# EAGLE board ECU_MULT_CAR (EAGLE 7.4.0), part 1 of 3
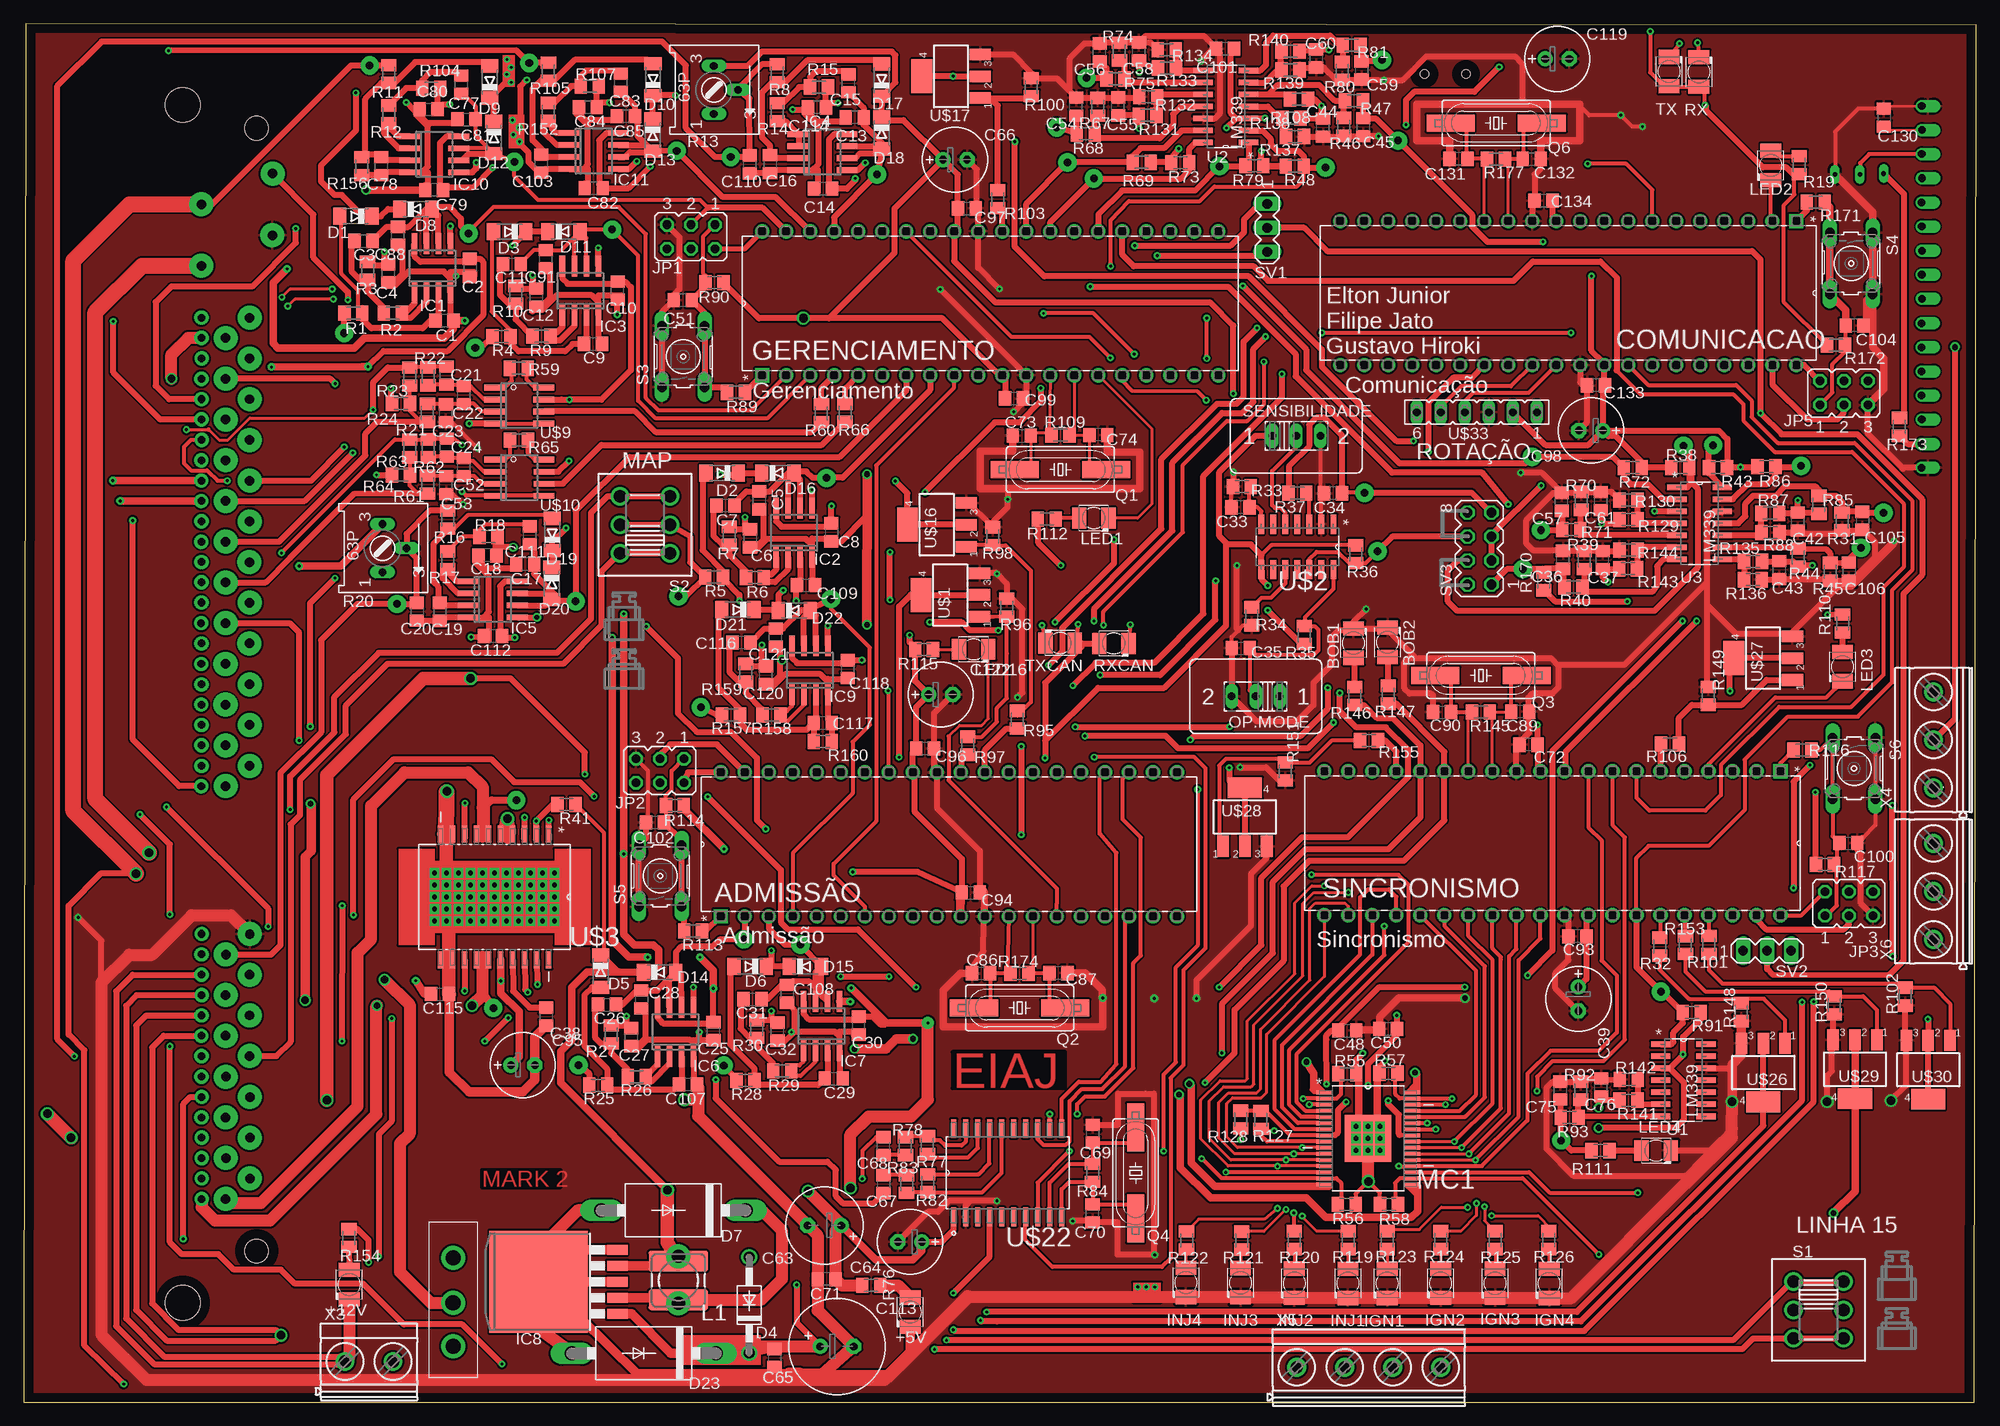
[diagram p0: board, top side]
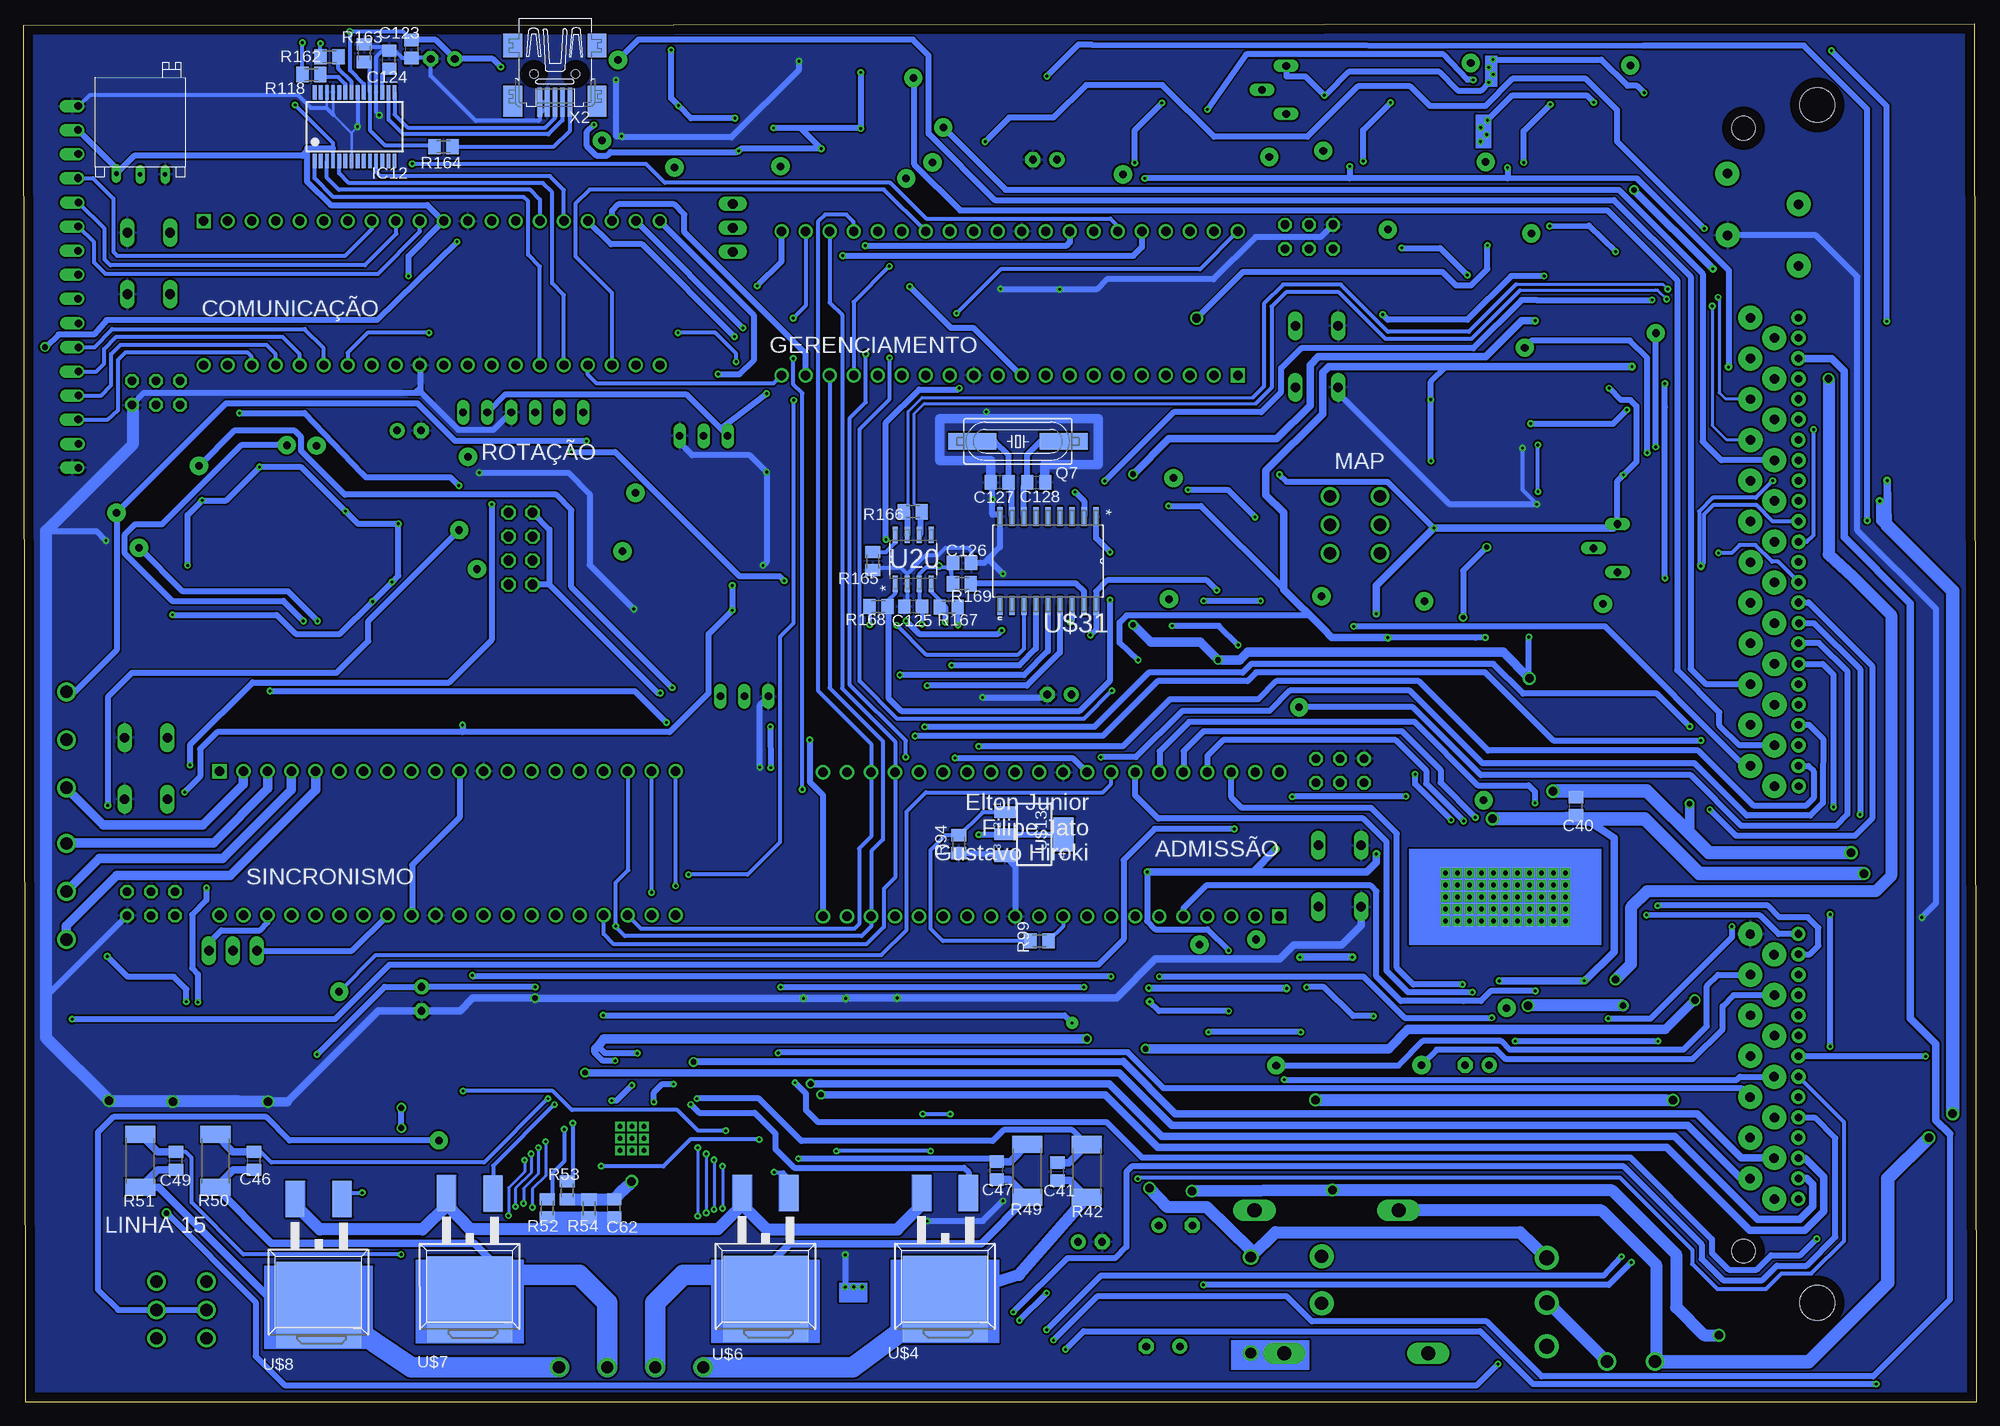
[diagram p1: board, bottom side, seen from below]

Size 206.56 x 145.88 mm. Coordinates in mm from the lower left corner, seen from the top.
Outline: 0,0 0.21,145.88 206.56,145.7 206.32,0.63
Outline: 0,0 206.33,0 206.33,0.64
Copper layers (1*16): Top 0.035mm / dielectric 1.5mm / Bottom 0.035mm
Design rules "default *": minimum track width 24mil, minimum drill 24mil, track to track 8mil, track to pad 8mil, pad to pad 8mil, via to via 8mil, smd to smd 8mil, copper to edge 40mil, drill to drill 8mil, minimum pad ring 10mil, minimum via ring 8mil, stop-mask expansion 4mil, vias tented up to drill 0mil, thermal gap 10mil
Net classes: 0 default: clearance 0.205 mm
bKeepout: area -69.6,118 to -69.6,118.1; area -69.6,118 to -69.6,118.1; area -69.6,118 to -69.6,118; area -69.6,118 to -69.6,118; area -69.6,118 to -69.6,118; area -69.6,118 to -69.6,118; area -69.6,118 to -69.6,118; area -69.6,118 to -69.6,118; area -69.6,118 to -69.6,118; area -69.6,118 to -69.6,118; area -69.6,118 to -69.6,118; area -69.6,118 to -69.6,118; 741 more areas

## Footprints (pad centres in the part's own frame; a part is rotated, then mirrored left to right if it is on the bottom)
KA-3528ASYC = smd 1.5 x 2.2: A -1.55,0; C 1.55,0
DIP40 = drill 0.991 square: 1 -7.62,24.13 | drill 0.991: 2 -7.62,21.59; 3 -7.62,19.05; 4 -7.62,16.51; 5 -7.62,13.97; 6 -7.62,11.43; 7 -7.62,8.89; 8 -7.62,6.35; 9 -7.62,3.81; 10 -7.62,1.27; 11 -7.62,-1.27; 12 -7.62,-3.81; 13 -7.62,-6.35; 14 -7.62,-8.89; 15 -7.62,-11.43; 16 -7.62,-13.97; 17 -7.62,-16.51; 18 -7.62,-19.05; 19 -7.62,-21.59; 20 -7.62,-24.13; 21 7.62,-24.13; 22 7.62,-21.59; 23 7.62,-19.05; 24 7.62,-16.51; 25 7.62,-13.97; 26 7.62,-11.43; 27 7.62,-8.89; 28 7.62,-6.35; 29 7.62,-3.81; 30 7.62,-1.27; 31 7.62,1.27; 32 7.62,3.81; 33 7.62,6.35; 34 7.62,8.89; 35 7.62,11.43; 36 7.62,13.97; 37 7.62,16.51; 38 7.62,19.05; 39 7.62,21.59; 40 7.62,24.13
PINO_TORNEADO = drill 0.8 pad 1.93: 1 0,0
C0805 = smd 1.3 x 1.5: 1 -0.95,0; 2 0.95,0
E2,5-7 = drill 0.813 pad 1.6: + -1.27,0 | drill 0.813 pad 1.6 octagon: - 1.27,0
E3,5-8 = drill 0.813 pad 1.6: + -1.778,0 | drill 0.813 pad 1.6 octagon: - 1.778,0
E3,5-10 = drill 0.813 pad 1.6: + -1.778,0 | drill 0.813 pad 1.6 octagon: - 1.778,0
MINIMELF = smd 1.4 x 1.8: A 1.7,0; C -1.7,0
DO41-10 = drill 1.118: A 5.08,0; C -5.08,0
DO201-15 = drill 1.499 long: A 7.62,0; C -7.62,0
SO08 = smd 0.6 x 2.2: 1 -1.905,-2.6; 2 -0.635,-2.6; 3 0.635,-2.6; 4 1.905,-2.6; 5 1.905,2.6; 6 0.635,2.6; 7 -0.635,2.6; 8 -1.905,2.6
TO263-5 = smd 1.067 x 2.159: 1 -3.404,-5.791; 2 -1.702,-5.791; 3 0,-5.791; 4 1.702,-5.791; 5 3.404,-5.791 | smd 10.8 x 10.41: 6 0,2.54
SSOP28 = smd 0.4 x 1.5: 1 -4.225,-3.625; 2 -3.575,-3.625; 3 -2.925,-3.625; 4 -2.275,-3.625; 5 -1.625,-3.625; 6 -0.975,-3.625; 7 -0.325,-3.625; 8 0.325,-3.625; 9 0.975,-3.625; 10 1.625,-3.625; 11 2.275,-3.625; 12 2.925,-3.625; 13 3.575,-3.625; 14 4.225,-3.625; 15 4.225,3.625; 16 3.575,3.625; 17 2.925,3.625; 18 2.275,3.625; 19 1.625,3.625; 20 0.975,3.625; 21 0.325,3.625; 22 -0.325,3.625; 23 -0.975,3.625; 24 -1.625,3.625; 25 -2.275,3.625; 26 -2.925,3.625; 27 -3.575,3.625; 28 -4.225,3.625
JP3Q = drill 0.914 octagon: 1 -2.54,-1.27; 2 -2.54,1.27; 3 0,-1.27; 4 0,1.27; 5 2.54,-1.27; 6 2.54,1.27
POWER-CHOKE_WE-TPC = smd 6.3 x 2.2: 1 0,2.05; 2 0,-2.05
SOIC_32_PIN = smd 1.6 x 0.432: 1 -4.699,4.877; 2 -4.699,4.216; 3 -4.699,3.581; 4 -4.699,2.921; 5 -4.699,2.286; 6 -4.699,1.626; 7 -4.699,0.965; 8 -4.699,0.33; 9 -4.699,-0.33; 10 -4.699,-0.965; 11 -4.699,-1.626; 12 -4.699,-2.286; 13 -4.699,-2.921; 14 -4.699,-3.581; 15 -4.699,-4.216; 16 -4.699,-4.877; 17 4.699,-4.877; 18 4.699,-4.216; 19 4.699,-3.581; 20 4.699,-2.921; 21 4.699,-2.286; 22 4.699,-1.626; 23 4.699,-0.965; 24 4.699,-0.33; 25 4.699,0.33; 26 4.699,0.965; 27 4.699,1.626; 28 4.699,2.286; 29 4.699,2.921; 30 4.699,3.581; 31 4.699,4.216; 32 4.699,4.877 | smd 4.953 x 4.953: 33 0,0 | drill 0.5 square: P$1 0,0; P$2 1.27,0; P$3 -1.27,0; P$4 -1.27,1.27; P$5 0,1.27; P$6 1.27,1.27; P$7 1.27,-1.27; P$8 0,-1.27; P$9 -1.27,-1.27
M251 = drill 0.813 long: 1 -2.54,0; 2 0,0; 3 2.54,0
V23542-A1280-B300 = drill 1 pad 2.54: 1 72.378,-4.91; 2 65.861,-4.9; 27 69.126,2.618; 28 62.618,2.61; 29 57.128,-2.488; 30 52.809,-2.488; 31 48.516,-2.488; 32 44.198,-2.471; 33 39.888,-2.479; 34 35.57,-2.479; 35 31.27,-2.467; 36 26.977,-2.477; 37 22.663,-2.467; 38 18.329,-2.477; 39 14.035,-2.484; 40 9.711,-2.484; 41 54.973,0.056; 42 50.663,0.056; 43 46.353,0.056; 44 42.052,0.065; 45 37.742,0.065; 46 33.432,0.059; 47 29.118,0.059; 48 24.815,0.059; 49 20.491,0.069; 50 16.177,0.069; 51 11.866,0.053; 52 7.563,0.053; 67 -8.09,-2.497; 68 -12.391,-2.488; 69 -16.701,-2.488; 70 -21.002,-2.488; 71 -25.338,-2.505; 72 -29.648,-2.505; 73 -33.957,-2.505; 74 -10.253,0.039; 75 -14.554,0.056; 76 -18.847,0.056; 77 -23.191,0.039; 78 -27.501,0.048; 79 -31.794,0.039; 80 -36.121,0.048 | drill 0.8 pad 1.5: 3 57.132,2.617; 4 52.818,2.596; 5 48.515,2.607; 6 44.201,2.596; 7 39.887,2.627; 8 35.583,2.607; 9 31.279,2.617; 10 26.986,2.617; 11 22.662,2.617; 12 18.33,2.612; 13 14.038,2.612; 14 9.71,2.6; 15 54.991,2.607; 16 50.656,2.617; 17 46.373,2.617; 18 42.039,2.627; 19 37.735,2.627; 20 33.421,2.627; 21 29.138,2.617; 22 24.814,2.637; 23 20.494,2.637; 24 16.19,2.624; 25 11.886,2.612; 26 7.558,2.637; 53 -8.079,2.586; 54 -12.392,2.607; 55 -16.702,2.6; 56 -21.006,2.6; 57 -25.324,2.596; 58 -29.628,2.596; 59 -33.952,2.596; 60 -10.23,2.607; 61 -14.55,2.587; 62 -18.854,2.624; 63 -23.182,2.612; 64 -27.496,2.617; 65 -31.8,2.586; 66 -36.114,2.596 | hole 2.5: 77.179,-3.212; -41.621,-3.229 | hole 3.7: 79.642,4.596; -47.122,4.596
SM49 = smd 5.08 x 1.778: 1 -4.826,0; 2 4.826,0
M0805 = smd 1.3 x 1.6: 1 -0.95,0; 2 0.95,0
S63P = drill 0.813 long: A 2.54,0; E -2.54,0; S 0,2.54
R2512 = smd 1.8 x 3.2: 1 -2.8,0; 2 2.8,0
2P2T = drill 1.3 pad 1.93: 1.1 -3,2.65; 1.2 -3,-2.65; 2.1 0,2.65; 2.2 0,-2.65; 3.1 3,2.65; 3.2 3,-2.65
B3F-10XX = drill 1.016 long: 1 -3.251,2.261; 2 3.251,2.261; 3 -3.251,-2.261; 4 3.251,-2.261
MA03-1 = drill 1.016 long: 1 -2.54,0; 2 0,0; 3 2.54,0
MA04-2 = drill 1.016 octagon: 1 -3.81,-1.27; 2 -3.81,1.27; 3 -1.27,-1.27; 4 -1.27,1.27; 5 1.27,-1.27; 6 1.27,1.27; 7 3.81,-1.27; 8 3.81,1.27
SOIC14N = smd 2.057 x 0.61: 1 -2.261,3.81; 2 -2.261,2.54; 3 -2.261,1.27; 4 -2.261,0; 5 -2.261,-1.27; 6 -2.261,-2.54; 7 -2.261,-3.81; 8 2.54,-3.81; 9 2.54,-2.54; 10 2.54,-1.27; 11 2.54,0; 12 2.54,1.27; 13 2.54,2.54; 14 2.54,3.81
SOIC127P600X175-8N = smd 1.702 x 0.533: 1 -2.591,1.905; 2 -2.591,0.635; 3 -2.591,-0.635; 4 -2.591,-1.905; 5 2.591,-1.905; 6 2.591,-0.635; 7 2.591,0.635; 8 2.591,1.905
SOT-223 = smd 1.219 x 2.235: 1 -2.311,-3.099; 2 0,-3.099; 3 2.311,-3.099 | smd 3.6 x 2.2: 4 0,3.099
SOICLM1815 = smd 2.057 x 0.61: 1 -2.261,3.81; 2 -2.261,2.54; 3 -2.261,1.27; 4 -2.261,0; 5 -2.261,-1.27; 6 -2.261,-2.54; 7 -2.261,-3.81; 8 2.54,-3.81; 9 2.54,-2.54; 10 2.54,-1.27; 11 2.54,0; 12 2.54,1.27; 13 2.54,2.54; 14 2.54,3.81
HSOP-20-PIN = smd 1.803 x 0.559: 1 -6.68,5.715; 2 -6.68,4.445; 3 -6.68,3.175; 4 -6.68,1.905; 5 -6.68,0.635; 6 -6.68,-0.635; 7 -6.68,-1.905; 8 -6.68,-3.175; 9 -6.68,-4.445; 10 -6.68,-5.715; 11 6.68,-5.715; 12 6.68,-4.445; 13 6.68,-3.175; 14 6.68,-1.905; 15 6.68,-0.635; 16 6.68,0.635; 17 6.68,1.905; 18 6.68,3.175; 19 6.68,4.445; 20 6.68,5.715 | smd 1 x 0.35: 21A -0.002,0.351 | drill 0.5 square: P$2 0,0; P$3 1.27,0; P$4 2.54,0; P$5 2.54,1.27; P$6 1.27,1.27; P$7 0,1.27; P$8 -1.27,1.27; P$9 -2.54,1.27; P$10 -2.54,0; P$11 -1.27,0; P$12 -1.27,2.54; P$13 -2.54,2.54; P$14 -2.54,3.81; P$15 -1.27,3.81; P$16 0,2.54; P$17 0,3.81; P$18 1.27,3.81; P$19 1.27,2.54; P$20 2.54,2.54; P$21 2.54,3.81; P$22 -2.54,5.08; P$23 -1.27,5.08; P$24 0,5.08; P$25 1.27,5.08; P$26 2.54,5.08; P$27 2.54,6.35; P$28 1.27,6.35; P$29 0,6.35; P$30 -1.27,6.35; P$31 -2.54,6.35; P$32 -2.54,-1.27; P$33 -1.27,-1.27; P$34 0,-1.27; P$35 1.27,-1.27; P$36 2.54,-1.27; P$37 2.54,-2.54; P$38 1.27,-2.54; P$39 0,-2.54; P$40 -1.27,-2.54; P$41 -2.54,-2.54; P$42 -2.54,-3.81; P$43 -1.27,-3.81; P$44 0,-3.81; P$45 1.27,-3.81; P$46 2.54,-3.81; P$47 2.54,-5.08; P$48 1.27,-5.08; P$49 0,-5.08; P$50 -1.27,-5.08; P$51 -2.54,-5.08; P$52 -2.54,-6.35; P$53 -1.27,-6.35; P$54 0,-6.35; P$55 1.27,-6.35; P$56 2.54,-6.35
TO-263AB = smd 1.93 x 3.81: DRAIN 2.458,-8.649; GATE -2.49,-8.649 | smd 8.992 x 9.093: SOURCE -0.032,2.572
SOIC-8 = smd 0.6 x 2.2: 1 -1.905,-2.6; 2 -0.635,-2.6; 3 0.635,-2.6; 4 1.905,-2.6; 5 1.905,2.6; 6 0.635,2.6; 7 -0.635,2.6; 8 -1.905,2.6
MAGIRUS_TICTAC_3_PIN = drill 1.6 pad 2.54: 1 5.08,0; 2 0.288,0.029; 3 -4.29,0
JHD162A = drill 0.8 offset: P$1 -30.916,16.342; P$2 -28.361,16.347; P$3 -25.826,16.342; P$4 -23.281,16.358; P$5 -20.69,16.328; P$6 -18.161,16.342; P$7 -15.606,16.347; P$8 -13.07,16.342; P$9 -10.525,16.358; P$10 -7.935,16.328; P$11 -5.385,16.327; P$12 -2.83,16.332; P$13 -0.294,16.327; P$14 2.25,16.343; P$15 4.841,16.313; P$16 7.371,16.327
SOIC-20P = smd 1.981 x 0.559: 1 -4.674,5.715; 2 -4.674,4.445; 3 -4.674,3.175; 4 -4.674,1.905; 5 -4.674,0.635; 6 -4.674,-0.635; 7 -4.674,-1.905; 8 -4.674,-3.175; 9 -4.674,-4.445; 10 -4.674,-5.715; 11 4.674,-5.715; 12 4.674,-4.445; 13 4.674,-3.175; 14 4.674,-1.905; 15 4.674,-0.635; 16 4.674,0.635; 17 4.674,1.905; 18 4.674,3.175; 19 4.674,4.445; 20 4.674,5.715
SOIC127P1034X264-18N = smd 1.981 x 0.559: 1 -4.699,5.08; 2 -4.699,3.81; 3 -4.699,2.54; 4 -4.699,1.27; 5 -4.699,0; 6 -4.699,-1.27; 7 -4.699,-2.54; 8 -4.699,-3.81; 9 -4.699,-5.08; 10 4.699,-5.08; 11 4.699,-3.81; 12 4.699,-2.54; 13 4.699,-1.27; 14 4.699,0; 15 4.699,1.27; 16 4.699,2.54; 17 4.699,3.81; 18 4.699,5.08
TRIMPOT = drill 0.5 long: 1 10.259,7.373; 2 10.256,4.732; 3 10.182,2.231
FE06 = drill 0.813 long: 1 -6.35,0; 2 -3.81,0; 3 -1.27,0; 4 1.27,0; 5 3.81,0; 6 6.35,0
32005-201 = smd 3.1 x 0.5: 1 3,1.6; 2 3,0.8; 3 3,0; 4 3,-0.8; 5 3,-1.6 | smd 2.5 x 2: M1 -3,-4.45; M2 -3,4.45 | smd 3.3 x 2: M3 2.9,4.45; M4 2.9,-4.45 | hole 0.9: 0,2.2; 0,-2.2
MKDSN1,5/2-5,08 = drill 1.3 pad 2: 1 -2.561,0.025; 2 2.519,0.025
MKDSN1,5/3-5,08 = drill 1.3 pad 2: 1 -7.641,0.025; 2 -2.561,0.025; 3 2.519,0.025
MKDSN1,5/4-5,08 = drill 1.3 pad 2: 1 -7.641,0.025; 2 -2.561,0.025; 3 2.519,0.025; 4 7.599,0.025

## Placement (x,y rotation side)
+5V  [KA-3528ASYC]  93.78,9.53 270 top
+12V  [KA-3528ASYC]  34.44,12.45 270 top
ADMISSÃO  PIC18F44K22  [DIP40]  97.87,59.04 90 top
ANTER_IN  PINO_TORNEADO  [PINO_TORNEADO]  71.63,73.55 90 top
BOB1  [KA-3528ASYC]  140.67,80.33 90 top
BOB2  [KA-3528ASYC]  144.27,80.41 90 top
BORBOLETA_1  PINO_TORNEADO  [PINO_TORNEADO]  52.12,63.7 270 top
BORBOLETA_2  PINO_TORNEADO  [PINO_TORNEADO]  49.68,41.72 270 top
C1  100nF  [C0805]  44.52,114.46 0 top
C2  100nF  [C0805]  47.2,120.04 270 top
C3  100nF  [C0805]  35.95,122.88 0 top
C4  100nF  [C0805]  38.58,119.45 90 top
C5  100nF  [C0805]  77.81,95.43 270 top
C6  100nF  [C0805]  76.83,91.42 270 top
C7  100nF  [C0805]  74.24,94.87 180 top
C8  100nF  [C0805]  85.44,92.04 270 top
C9  100nF  [C0805]  60.22,111.99 0 top
C10  100nF  [C0805]  62.84,117.62 90 top
C11  100nF  [C0805]  51.65,120.42 0 top
C12  100nF  [C0805]  54.23,116.89 90 top
C13  100nF  [C0805]  87.92,135.95 180 top
C14  100nF  [C0805]  84.55,128.4 180 top
C15  100nF  [C0805]  87.26,139.56 90 top
C16  100nF  [C0805]  78.96,131.02 270 top
C17  100nF  [C0805]  53.06,88.66 180 top
C18  100nF  [C0805]  49.08,89.6 180 top
C19  100nF  [C0805]  44.02,83.64 270 top
C20  100nF  [C0805]  41.6,83.66 270 top
C21  1uF  [C0805]  44.73,108.64 90 top
C22  1uF  [C0805]  46.57,106.57 90 top
C23  1uF  [C0805]  44.68,104.66 90 top
C24  1uF  [C0805]  44.75,101.03 90 top
C25  100nF  [C0805]  72.97,39.27 90 top
C26  100nF  [C0805]  61.72,42.08 0 top
C27  100nF  [C0805]  64.28,38.64 90 top
C28  100nF  [C0805]  65.35,42.63 270 top
C29  100nF  [C0805]  85.69,34.26 0 top
C30  100nF  [C0805]  88.34,39.84 90 top
C31  100nF  [C0805]  77.11,42.65 0 top
C32  100nF  [C0805]  79.75,39.21 90 top
C33  330nF  [C0805]  128.71,94.71 180 top
C34  47nF  [C0805]  138.51,96.18 180 top
C35  1nF  [C0805]  128.74,79.79 0 top
C36  100nF  [C0805]  162.84,89.15 90 top
C37  100nF  [C0805]  167.03,89.11 90 top
C38  33nF  [C0805]  55.27,40.81 270 top
C39  100uF/16V  [E2,5-7]  164.47,42.68 270 top
C40  100nF  [C0805]  42.36,63.07 90 bottom
C41  100nF  [C0805]  97.21,24.4 90 bottom
C42  100nF  [C0805]  187.66,93.18 270 top
C43  100nF  [C0805]  185.71,88.06 270 top
C44  100nF  [C0805]  137.46,134.87 90 top
C45  100nF  [C0805]  141.72,134.92 90 top
C46  100nF  [C0805]  182.19,25.54 90 bottom
C47  100nF  [C0805]  103.64,24.51 90 bottom
C48  100nF  [C0805]  140.01,39.33 0 top
C49  100nF  [C0805]  190.44,25.54 90 bottom
C50  100nF  [C0805]  144.34,39.49 180 top
C51  100pF  [C0805]  69.71,116.61 180 top
C52  1uF  [C0805]  46.57,98.96 90 top
C53  1uF  [C0805]  44.7,97.05 90 top
C54  100nF  [C0805]  111.34,137.08 90 top
C55  100nF  [C0805]  115.79,137.11 90 top
C56  100nF  [C0805]  113.83,142.84 90 top
C57  100nF  [C0805]  162.7,95.29 90 top
C58  100nF  [C0805]  117.99,142.92 90 top
C59  100nF  [C0805]  141.53,140.94 270 top
C60  100nF  [C0805]  136.72,142.18 270 top
C61  100nF  [C0805]  166.84,95.36 90 top
C62  100nF  [C0805]  144.1,20.51 90 bottom
C63  470uf/25V  [E3,5-8]  84.71,18.7 180 top
C64  100uF/16V  [E2,5-7]  93.75,16.98 180 top
C65  100nF  [C0805]  79.44,4.69 270 top
C66  100uF/16V  [E2,5-7]  98.53,131.48 0 top
C67  100nF  [C0805]  90.97,23.08 270 top
C68  100nF  [C0805]  90.95,27.1 90 top
C69  22pF  [C0805]  113.09,28.41 270 top
C70  22pF  [C0805]  113.08,19.98 90 top
C71  100nF  [C0805]  84.95,13.02 180 top
C72  100pF  [C0805]  159.19,69.58 180 top
C73  22pF  [C0805]  105.59,102.28 0 top
C74  22pF  [C0805]  113.69,102.36 180 top
C75  100nF  [C0805]  162.56,32.99 90 top
C76  100nF  [C0805]  166.88,33.31 90 top
C77  100nF  [C0805]  46.28,139.42 270 top
C78  100nF  [C0805]  37.81,130.79 270 top
C79  100nF  [C0805]  43.42,128.26 180 top
C80  100nF  [C0805]  42.84,136.82 0 top
C81  100nF  [C0805]  46.84,135.76 0 top
C82  100nF  [C0805]  60.3,128.48 0 top
C83  100nF  [C0805]  63.16,139.63 270 top
C84  100nF  [C0805]  59.69,137.05 0 top
C85  100nF  [C0805]  63.73,136.08 180 top
C86  22pF  [C0805]  101.28,45.4 0 top
C87  22pF  [C0805]  109.46,45.41 180 top
C88  100nF  [C0805]  39.6,123.42 90 top
C89  22pF  [C0805]  158.32,73.07 180 top
C90  22pF  [C0805]  150.05,73.02 0 top
C91  100nF  [C0805]  55.24,120.96 90 top
C93  100pF  [C0805]  164.36,49.29 180 top
C94  100pF  [C0805]  100.2,53.93 0 top
C95  47uF/25V  [E2,5-7]  52.81,35.67 0 top
C96  100pF  [C0805]  95.36,69.18 0 top
C97  100pF  [C0805]  99.77,126.33 0 top
C98  100uF/16V  [E2,5-7]  165.79,102.83 180 top
C99  100pF  [C0805]  104.77,106.22 0 top
C100  100pF  [C0805]  193.02,59.17 0 top
C101  100nF  [C0805]  127.09,143.22 180 top
C102  100pF  [C0805]  66.79,61.34 180 top
C103  100nF  [C0805]  54.76,131.06 90 top
C104  100nF  [C0805]  193.69,113.93 180 top
C105  100nF  [C0805]  194.5,93.28 270 top
C106  100nF  [C0805]  193.07,87.9 270 top
C107  100nF  [C0805]  70.29,33.63 180 top
C108  100nF  [C0805]  80.74,43.22 270 top
C109  100nF  [C0805]  82.77,86.46 0 top
C110  100nF  [C0805]  76.81,130.99 270 top
C111  100nF  [C0805]  53.54,91.75 270 top
C112  100nF  [C0805]  49.66,81.07 180 top
C113  680uF/35V  [E3,5-10]  86.03,5.9 0 top
C114  100nF  [C0805]  83.93,137.01 180 top
C115  100nF  [C0805]  44.03,43.2 0 top
C116  100nF  [C0805]  75.94,80.39 0 top
C117  100nF  [C0805]  84.53,71.88 0 top
C118  100nF  [C0805]  87.16,77.58 270 top
C119  4u7F/16V  [E2,5-7]  162.23,142.15 0 top
C120  100nF  [C0805]  78.52,76.92 90 top
C121  100nF  [C0805]  79.55,80.91 90 top
C122  100uF/16V  [E2,5-7]  97,74.89 0 top
C123  100nF  [C0805]  165.54,143.21 270 bottom
C124  100nF  [C0805]  167.9,142.06 90 bottom
C125  100nF  [C0805]  112.47,84.18 180 bottom
C126  100nF  [C0805]  107.3,88.82 0 bottom
C127  10pF  [C0805]  103.32,97.34 180 bottom
C128  10pF  [C0805]  99.45,97.34 0 bottom
C130  100nF  [C0805]  196.78,135.93 270 top
C131  22pF  [C0805]  151.79,131.57 180 top
C132  22pF  [C0805]  159.52,131.56 0 top
C133  100pF  [C0805]  166.33,107.59 180 top
C134  100pF  [C0805]  160.79,127.13 180 top
COMUNICACAO  PIC18F44K22  [DIP40]  163.39,117.37 270 top
COND_ANA2_IN  PINO_TORNEADO  [PINO_TORNEADO]  53.48,141.71 90 top
COND_ANA_1_IN  PINO_TORNEADO  [PINO_TORNEADO]  36.6,141.46 0 top
D1  1n4148  [MINIMELF]  35.15,125.5 180 top
D2  1n4148  [MINIMELF]  73.89,98.3 180 top
D3  1n4148  [MINIMELF]  51.4,123.86 180 top
D4  1N4004  [DO41-10]  76.76,10.29 90 top
D5  1n4148  [MINIMELF]  61.05,45.6 270 top
D6  1n4148  [MINIMELF]  76.84,46.11 180 top
D7  1N5624  [DO201-15]  68.74,20.3 180 top
D8  1n4148  [MINIMELF]  41.5,126.26 0 top
D9  1n4148  [MINIMELF]  49.31,139.71 90 top
D10  1n4148  [MINIMELF]  66.58,139.94 90 top
D11  1n4148  [MINIMELF]  57.15,123.87 0 top
D12  1n4148  [MINIMELF]  49.75,133.83 270 top
D13  1n4148  [MINIMELF]  66.55,134.09 270 top
D14  1n4148  [MINIMELF]  67.27,45.5 0 top
D15  1n4148  [MINIMELF]  82.69,46.11 0 top
D16  1n4148  [MINIMELF]  79.78,98.33 0 top
D17  1n4148  [MINIMELF]  90.76,139.9 90 top
D18  1n4148  [MINIMELF]  90.76,134.31 270 top
D19  1n4148  [MINIMELF]  55.91,91.82 90 top
D20  1n4148  [MINIMELF]  55.88,86.64 270 top
D21  1n4148  [MINIMELF]  75.55,83.88 180 top
D22  1n4148  [MINIMELF]  81.52,83.79 0 top
D23  1N5624  [DO201-15]  65.6,5.18 180 top
DRILEGEND  [DRILEGEND]  0.28,0.42 0 top
GERENCIAMENTO  PIC18F44K22  [DIP40]  102.25,116.28 90 top
IC1  LM358D  [SO08]  43.25,120 0 top
IC2  LM358D  [SO08]  81.51,92.01 0 top
IC3  LM358D  [SO08]  58.89,117.62 0 top
IC4  LM358D  [SO08]  84.49,132.28 270 top
IC5  LM358D  [SO08]  49.62,84.95 270 top
IC6  LM358D  [SO08]  68.96,39.19 0 top
IC7  LM358D  [SO08]  84.4,39.82 0 top
IC8  LM2596S  [TO263-5]  57.02,12.74 90 top
IC9  LM358D  [SO08]  83.18,77.45 0 top
IC10  LM358D  [SO08]  43.44,132.05 270 top
IC11  LM358D  [SO08]  60.32,132.4 270 top
IC12  FT232RL  [SSOP28]  171.55,134.97 0 bottom
IGN1  [KA-3528ASYC]  144.24,12.57 270 top
IGN2  [KA-3528ASYC]  149.89,12.59 270 top
IGN3  [KA-3528ASYC]  155.65,12.59 270 top
IGN4  [KA-3528ASYC]  161.37,12.57 270 top
INJ1  [KA-3528ASYC]  140.09,12.58 270 top
INJ2  [KA-3528ASYC]  134.42,12.59 270 top
INJ3  [KA-3528ASYC]  128.73,12.64 270 top
INJ4  [KA-3528ASYC]  122.95,12.67 270 top
JP1  [JP3Q]  70.58,123.33 180 top
JP2  [JP3Q]  67.31,66.83 180 top
JP3  [JP3Q]  193.08,52.76 0 top
JP5  [JP3Q]  192.56,106.8 0 top
L1  33uh-5A  [POWER-CHOKE_WE-TPC]  69.26,12.89 180 top
LED1  [KA-3528ASYC]  113.21,93.56 0 top
LED2  [KA-3528ASYC]  184.81,130.88 270 top
LED3  [KA-3528ASYC]  192.41,77.84 270 top
LED4  [KA-3528ASYC]  172.7,26.63 0 top
LED16  [KA-3528ASYC]  100.49,79.66 0 top
LINHA15  PINO_TORNEADO  [PINO_TORNEADO]  173.19,43.44 0 top
LINHA_15_IN  PINO_TORNEADO  [PINO_TORNEADO]  162.64,27.7 0 top
MAP_IN  PINO_TORNEADO  [PINO_TORNEADO]  69.27,85.29 90 top
MAP_OUT  PINO_TORNEADO  [PINO_TORNEADO]  84.94,97.8 90 top
MC1  MC33810  [SOIC_32_PIN]  142.22,27.91 0 top
MEDI_VELO_IN  PINO_TORNEADO  [PINO_TORNEADO]  196.74,94.12 0 top
MEDI_VELO_OUT  PINO_TORNEADO  [PINO_TORNEADO]  188.01,99.08 0 top
OP.MODE  [M251]  130.32,74.69 180 top
PEDAL1_IN  PINO_TORNEADO  [PINO_TORNEADO]  33.91,113.13 90 top
PEDAL2_IN  PINO_TORNEADO  [PINO_TORNEADO]  47.77,111.59 90 top
PIN  CONCTOR_BOSCH  [V23542-A1280-B300]  21.42,57.63 90 top
Q1  10Mhz  [SM49]  109.68,98.7 0 top
Q2  10Mhz  [SM49]  105.36,41.73 0 top
Q3  10Mhz  [SM49]  154.15,76.9 180 top
Q4  6Mhz  [SM49]  117.63,24.26 90 top
Q6  10Mhz  [SM49]  155.77,135.36 180 top
Q7  20MHZ  [SM49]  101.39,101.68 180 bottom
R1  10K  [M0805]  34.88,115.24 0 top
R2  10K  [M0805]  39.05,115.24 180 top
R3  10K  [M0805]  36.38,119.71 90 top
R4  10K  [M0805]  50.56,112.77 0 top
R5  10K  [M0805]  73.05,87.32 0 top
R6  10K  [M0805]  77.35,87.26 180 top
R7  10K  [M0805]  74.62,91.68 90 top
R8  10K  [M0805]  79.73,140.64 270 top
R9  10K  [M0805]  54.77,112.82 180 top
R10  10K  [M0805]  52.05,117.19 90 top
R11  10K  [M0805]  38.63,140.54 270 top
R12  10K  [M0805]  38.62,136.26 90 top
R13  5K  [S63P]  73.01,138.87 270 top
R14  10K  [M0805]  79.72,136.51 90 top
R15  10K  [M0805]  84.14,139.17 0 top
R16  10K  [M0805]  44.86,93.4 270 top
R17  10K  [M0805]  44.87,89.09 90 top
R18  10K  [M0805]  49.19,91.58 0 top
R19  1K  [M0805]  187.85,130.91 270 top
R20  5K  [S63P]  37.97,90.38 270 top
R21  4K7  [M0805]  42.72,104.7 90 top
R22  4K7  [M0805]  42.78,108.56 270 top
R23  100K  [M0805]  40.83,108.53 270 top
R24  100K  [M0805]  39.92,105.69 180 top
R25  10K  [M0805]  60.78,33.55 0 top
R26  10K  [M0805]  64.86,34.45 180 top
R27  10K  [M0805]  62.15,38.92 90 top
R28  10K  [M0805]  76.36,34.05 0 top
R29  10K  [M0805]  80.24,35.05 180 top
R30  10K  [M0805]  77.53,39.49 90 top
R31  5K6  [M0805]  192.36,93.2 270 top
R32  1K  [M0805]  173.06,48.2 90 top
R33  100K  [M0805]  128.87,96.88 0 top
R34  1K  [M0805]  129.91,83.16 90 top
R35  150K  [M0805]  135.48,81.17 90 top
R36  5K6  [M0805]  140.91,89.74 270 top
R37  18K  [M0805]  134.74,96.2 180 top
R38  10K  [M0805]  175.25,98.89 0 top
R39  5K6  [M0805]  165.09,89.11 90 top
R40  10K  [M0805]  163.95,86.24 0 top
R41  10K  [M0805]  57.43,63.26 180 top
R42  36k/1W  [R2512]  94.1,24.46 270 bottom
R43  10K  [M0805]  179.22,98.91 180 top
R44  10K  [M0805]  187.7,89.39 90 top
R45  5K6  [M0805]  191.11,87.87 270 top
R46  5K6  [M0805]  139.63,134.94 270 top
R47  10K  [M0805]  140.74,137.73 180 top
R48  10K  [M0805]  134.47,130.8 0 top
R49  36k/1W  [R2512]  100.4,24.47 270 bottom
R50  36k/1W  [R2512]  186.27,25.53 270 bottom
R51  36k/1W  [R2512]  194.22,25.54 270 bottom
R52  100R  [M0805]  151.16,20.52 270 bottom
R53  100R  [M0805]  149.08,22.42 270 bottom
R54  0R02  [M0805]  146.75,20.5 270 bottom
R55  4K  [M0805]  140.01,34.76 0 top
R56  4K  [M0805]  139.95,20.96 0 top
R57  4K  [M0805]  144.38,34.82 180 top
R58  4K  [M0805]  144.42,20.95 180 top
R59  100K  [M0805]  52.37,109.41 0 top
R60  100K  [M0805]  84.4,104.66 270 top
R61  4K7  [M0805]  42.73,97.11 90 top
R62  4K7  [M0805]  42.79,100.94 270 top
R63  100K  [M0805]  40.83,100.92 270 top
R64  100K  [M0805]  39.93,98.09 180 top
R65  100K  [M0805]  52.39,101.79 0 top
R66  100K  [M0805]  86.89,104.69 270 top
R67  5K6  [M0805]  113.62,137.08 90 top
R68  10K  [M0805]  112.36,134.21 0 top
R69  10K  [M0805]  118.27,131.19 180 top
R70  5K6  [M0805]  164.77,95.37 90 top
R71  10K  [M0805]  163.71,92.33 0 top
R72  10K  [M0805]  170.21,98.9 180 top
R73  10K  [M0805]  122.36,131.17 0 top
R74  5K6  [M0805]  115.92,142.92 90 top
R75  10K  [M0805]  115.49,140.03 0 top
R76  1K  [M0805]  89.65,12.37 180 top
R77  100K  [M0805]  95.61,27.2 90 top
R78  100K  [M0805]  93.28,27.11 270 top
R79  10K  [M0805]  130.19,130.86 180 top
R80  5K6  [M0805]  139.5,140.88 270 top
R81  10K  [M0805]  140.48,143.59 180 top
R82  100K  [M0805]  95.62,23.17 270 top
R83  100K  [M0805]  93.4,23.1 90 top
R84  1M  [M0805]  113.07,24.27 90 top
R85  10K  [M0805]  189.92,94.97 90 top
R86  10K  [M0805]  184.36,98.99 0 top
R87  10K  [M0805]  184.76,94.07 180 top
R88  10K  [M0805]  184.78,92.03 0 top
R89  470R  [M0805]  75.37,106.87 0 top
R90  10K  [M0805]  73.07,118.47 180 top
R91  10K  [M0805]  176.47,41.25 180 top
R92  5K6  [M0805]  164.71,32.96 90 top
R93  10K  [M0805]  163.54,30.13 0 top
R94  100k  [M0805]  107.66,59.06 90 bottom
R95  1k  [M0805]  105.1,72.23 270 top
R96  100k  [M0805]  103.99,84.09 270 top
R97  1k  [M0805]  99.88,69.46 270 top
R98  100k  [M0805]  102.5,91.65 270 top
R99  1k  [M0805]  99.1,48.79 0 bottom
R100  100k  [M0805]  106.6,139.15 270 top
R101  1k  [M0805]  178.28,48.39 90 top
R102  100k  [M0805]  199.02,42.92 90 top
R103  1k  [M0805]  103.06,127.3 270 top
R104  10K  [M0805]  43.12,139.05 0 top
R105  10K  [M0805]  55.52,140.8 270 top
R106  1K  [M0805]  174.15,69.66 180 top
R107  10K  [M0805]  59.89,139.26 0 top
R108  10K  [M0805]  134.9,137.88 180 top
R109  1M  [M0805]  109.68,102.34 0 top
R110  1K  [M0805]  192.41,82.41 90 top
R111  1K  [M0805]  166.8,26.63 180 top
R112  1K  [M0805]  108.23,93.44 180 top
R113  470R  [M0805]  70.82,49.85 0 top
R114  10K  [M0805]  68.89,63.15 180 top
R115  1K  [M0805]  95.26,79.64 180 top
R116  470R  [M0805]  188.16,69.02 180 top
R117  10K  [M0805]  190.54,56.9 0 top
R118  1K  [M0805]  176.13,140.5 180 bottom
R119  1K  [M0805]  140.12,17.17 270 top
R120  1K  [M0805]  134.4,17.15 270 top
R121  1K  [M0805]  128.85,17.11 270 top
R122  1K  [M0805]  123.01,17.13 270 top
R123  1K  [M0805]  144.24,17.17 270 top
R124  1K  [M0805]  149.92,17.15 270 top
R125  1K  [M0805]  155.65,17.16 270 top
R126  1K  [M0805]  161.34,17.17 270 top
R127  10K  [M0805]  130.89,29.88 90 top
R128  10K  [M0805]  128.75,29.92 90 top
R129  10K  [M0805]  169.77,93.41 0 top
R130  10K  [M0805]  169.77,95.46 180 top
R131  10K  [M0805]  118.9,136.17 0 top
R132  10K  [M0805]  118.97,138.14 180 top
R133  10K  [M0805]  120.96,141.18 0 top
R134  10K  [M0805]  120.91,143.14 180 top
R135  10K  [M0805]  182.95,88.98 180 top
R136  10K  [M0805]  182.92,87.03 0 top
R137  10K  [M0805]  134.13,135.86 180 top
R138  10K  [M0805]  134.5,133.94 0 top
R139  10K  [M0805]  134.02,142.95 180 top
R140  10K  [M0805]  134.02,140.98 0 top
R141  10K  [M0805]  169.76,31.96 0 top
R142  10K  [M0805]  169.79,34.14 180 top
R143  10K  [M0805]  169.73,88.19 0 top
R144  10K  [M0805]  169.76,90.17 180 top
R145  1M  [M0805]  154.15,73.02 0 top
R146  1K  [M0805]  140.83,74.73 90 top
R147  1K  [M0805]  144.35,74.87 90 top
R148  100k  [M0805]  181.7,41.28 90 top
R149  100k  [M0805]  178.19,74.74 270 top
R150  100k  [M0805]  191.52,42 90 top
R151  100k  [M0805]  133.46,66.74 90 top
R152  10K  [M0805]  55.48,136.53 90 top
R153  220R  [M0805]  175.79,48.38 90 top
R154  1K  [M0805]  34.41,17.38 90 top
R155  1K  [M0805]  142.32,70.02 0 top
R156  5K6  [M0805]  35.77,130.79 90 top
R157  3K6  [M0805]  74.84,72.7 0 top
R158  10K  [M0805]  79.11,72.71 180 top
R159  10K  [M0805]  76.38,77.19 90 top
R160  1K  [M0805]  84.54,69.93 180 top
R162  1K  [M0805]  174.22,142.39 180 bottom
R163  10K  [M0805]  170.54,142.76 270 bottom
R164  4K7  [M0805]  162.14,132.86 180 bottom
R165  10R  [M0805]  116.73,89 90 bottom
R166  120R  [M0805]  112.51,94.22 180 bottom
R167  1K  [M0805]  108.7,84.16 0 bottom
R168  1K  [M0805]  116.13,84.18 180 bottom
R169  10K  [M0805]  107.32,86.61 180 bottom
R170  10K  [M0805]  160.81,86.88 90 top
R171  470R  [M0805]  189.57,126.98 180 top
R172  10K  [M0805]  191.72,111.84 0 top
R173  10K  [M0805]  198.43,103.22 270 top
R174  1M  [M0805]  105.35,45.38 180 top
R177  1M  [M0805]  155.75,131.54 0 top
RA0_ADMISS_TPS_1  PINO_TORNEADO  [PINO_TORNEADO]  76.19,48.97 90 top
RA0_GERENC_BATERIA  PINO_TORNEADO  [PINO_TORNEADO]  51.91,131.25 0 top
RA1_ADMISS_TPS_2  PINO_TORNEADO  [PINO_TORNEADO]  82.19,48.43 90 top
RA1_GERENC_PEDAL_1  PINO_TORNEADO  [PINO_TORNEADO]  47.07,123.68 90 top
RA2_ADMISS_ALTERNADOR  PINO_TORNEADO  [PINO_TORNEADO]  85.42,84.98 90 top
RA2_GERENC_PEDAL2  PINO_TORNEADO  [PINO_TORNEADO]  62.25,124.08 90 top
RB5_GERENC_PRESSãO_A/C  PINO_TORNEADO  [PINO_TORNEADO]  69.09,132.43 90 top
RC2_GERENCI_COMBUSTIVEL  PINO_TORNEADO  [PINO_TORNEADO]  137.72,130.66 180 top
RC7_GERENCIA_EMBREAGEM  PINO_TORNEADO  [PINO_TORNEADO]  126.49,130.79 180 top
RD2_GERENC_FREIO_1  PINO_TORNEADO  [PINO_TORNEADO]  159.56,100.05 270 top
RD5_GERENC_FREIO_2  PINO_TORNEADO  [PINO_TORNEADO]  113.21,129.49 180 top
RD6_GERENC_BOTÃO_A/C  PINO_TORNEADO  [PINO_TORNEADO]  110.42,131.2 180 top
RE2_SINCRO_FASE  PINO_TORNEADO  [PINO_TORNEADO]  178.72,101.28 0 top
RELUTÂNCIA  PINO_TORNEADO  [PINO_TORNEADO]  141.85,96.23 0 top
ROT_ANAL  PINO_TORNEADO  [PINO_TORNEADO]  143.21,90.05 0 top
ROT_DIG_IN  PINO_TORNEADO  [PINO_TORNEADO]  158.6,88.16 0 top
ROT_DIG_OUT  PINO_TORNEADO  [PINO_TORNEADO]  175.58,101.22 0 top
RX  [KA-3528ASYC]  177.21,140.77 90 top
RXCAN  [KA-3528ASYC]  115.32,80.3 0 top
S1  2P2T  [2P2T]  189.87,9.76 270 top
S2  2P2T  [2P2T]  65.73,92.85 90 top
S3  [B3F-10XX]  69.78,110.65 90 top
S4  [B3F-10XX]  193.32,120.51 270 top
S5  [B3F-10XX]  67.34,55.69 90 top
S6  [B3F-10XX]  193.63,67.07 270 top
SENSIBILIDADE  [M251]  134.63,102.27 0 top
SENSO_EMBR_IN  PINO_TORNEADO  [PINO_TORNEADO]  143.7,142.02 180 top
SENSO_FREIO_IN  PINO_TORNEADO  [PINO_TORNEADO]  112.45,140.12 270 top
SENSOR_COMB_IN  PINO_TORNEADO  [PINO_TORNEADO]  145.39,133.5 90 top
SENSOR_FASE_IN  PINO_TORNEADO  [PINO_TORNEADO]  194.35,90.42 0 top
SENSOR_IN  PINO_TORNEADO  [PINO_TORNEADO]  109.28,134.9 180 top
SENSOR_IN1  PINO_TORNEADO  [PINO_TORNEADO]  160.49,92.29 270 top
SINCRONISMO  PIC18F44K22  [DIP40]  161.72,59.15 270 top
SV1  [MA03-1]  131.55,124.27 270 top
SV2  [MA03-1]  184.43,47.76 0 top
SV3  [MA04-2]  154,90.33 90 top
TEMP_AR_IN  PINO_TORNEADO  [PINO_TORNEADO]  74.8,131.76 180 top
TEMP_AR_OUT  PINO_TORNEADO  [PINO_TORNEADO]  90.27,129.93 180 top
TEMP_H2O_IN  PINO_TORNEADO  [PINO_TORNEADO]  39.5,84.47 0 top
TEMP_H2O_OUT  PINO_TORNEADO  [PINO_TORNEADO]  58.4,84.76 0 top
TPS_1_IN  PINO_TORNEADO  [PINO_TORNEADO]  58.7,35.68 90 top
TPS_2_IN  PINO_TORNEADO  [PINO_TORNEADO]  74.06,35.64 90 top
TX  [KA-3528ASYC]  174.06,140.81 90 top
TXCAN  [KA-3528ASYC]  109.64,80.34 180 top
U1  LM339  [SOIC14N]  175.44,34.07 0 top
U2  LM339  [SOIC14N]  127.32,137.11 180 top
U3  LM339  [SOIC14N]  177.14,93.01 0 top
U20  PCA82C251T/N3  [SOIC127P600X175-8N]  112.46,89.2 90 bottom
U$1  IRLL014N  [SOT-223]  98.02,85.42 90 top
U$2  LM1815  [SOICLM1815]  134.74,90.65 270 top
U$3  MC33186  [HSOP-20-PIN]  49.82,53.47 270 top
U$4  IRGS14C40L  [TO-263AB]  109.1,13.5 180 bottom
U$6  IRGS14C40L  [TO-263AB]  128.1,13.5 180 bottom
U$7  IRGS14C40L  [TO-263AB]  159.39,13.48 180 bottom
U$8  IRGS14C40L  [TO-263AB]  175.37,12.88 180 bottom
U$9  AD623  [SOIC-8]  52.43,105.46 270 top
U$10  AD623  [SOIC-8]  52.45,97.83 270 top
U$11  MAGIRUS_17105  [MAGIRUS_TICTAC_3_PIN]  45.45,10.22 90 top
U$13  IRLL014N  [SOT-223]  99.66,60.1 270 bottom
U$14  [A4L-LOC]  0.28,0.42 0 top
U$16  IRLL014N  [SOT-223]  96.59,92.85 90 top
U$17  IRLL014N  [SOT-223]  98.1,140.31 90 top
U$19  JHD162A  [JHD162A]  184.45,106.25 270 top
U$22  TPIC8101  [SOIC-20P]  104.1,24.29 90 top
U$26  IRLL014N  [SOT-223]  184.03,34.88 180 top
U$27  IRLL014N  [SOT-223]  184.01,78.73 90 top
U$28  IRLL014N  [SOT-223]  129.19,61.93 0 top
U$29  IRLL014N  [SOT-223]  193.73,35.23 180 top
U$30  IRLL014N  [SOT-223]  201.47,35.18 180 top
U$31  MCP2515-I/SO  [SOIC127P1034X264-18N]  98.21,89.01 270 bottom
U$32  TRIMPOT  [TRIMPOT]  198.98,140.19 270 bottom
U$33  HC-06  [FE06]  153.72,104.76 180 top
X2  MINI-USB-32005-201  [32005-201]  150.37,140.56 270 bottom
X3  MKDSN1,5/2-5,08  [MKDSN1,5/2-5,08]  36.55,4.28 0 top
X4  MKDSN1,5/3-5,08  [MKDSN1,5/3-5,08]  202.06,72.65 90 top
X5  MKDSN1,5/4-5,08  [MKDSN1,5/4-5,08]  142.32,3.67 0 top
X6  MKDSN1,5/3-5,08  [MKDSN1,5/3-5,08]  202.06,56.6 90 top

## Library data of the parts
+5V +12V BOB1 BOB2 IGN1-IGN4 INJ1-INJ4 LED1-LED4 LED16 RX RXCAN TX TXCAN = led
ADMISSÃO ANTER_IN BORBOLETA_1 BORBOLETA_2 COMUNICACAO COND_ANA2_IN COND_ANA_1_IN GERENCIAMENTO LINHA15 LINHA_15_IN MAP_IN MAP_OUT MC1 MEDI_VELO_IN MEDI_VELO_OUT PEDAL1_IN PEDAL2_IN PIN RA0_ADMISS_TPS_1 RA0_GERENC_BATERIA RA1_ADMISS_TPS_2 RA1_GERENC_PEDAL_1 RA2_ADMISS_ALTERNADOR RA2_GERENC_PEDAL2 RB5_GERENC_PRESSãO_A/C RC2_GERENCI_COMBUSTIVEL RC7_GERENCIA_EMBREAGEM RD2_GERENC_FREIO_1 RD5_GERENC_FREIO_2 RD6_GERENC_BOTÃO_A/C RE2_SINCRO_FASE RELUTÂNCIA ROT_ANAL ROT_DIG_IN ROT_DIG_OUT SENSO_EMBR_IN SENSO_FREIO_IN SENSOR_COMB_IN SENSOR_FASE_IN SENSOR_IN SENSOR_IN1 SINCRONISMO TEMP_AR_IN TEMP_AR_OUT TEMP_H2O_IN TEMP_H2O_OUT TPS_1_IN TPS_2_IN U1-U3 U$1-U$4 U$6-U$11 U$13 U$16 U$17 U$19 U$22 U$26-U$30 U$32 U$33 = MyLibs
C1-C38 C40-C62 C65 C67-C91 C93 C94 C96 C97 C99-C112 C114-C118 C120 C121 C123-C128 C130-C134 R42 R49-R51 = resistor
C39 C63 C64 C66 C95 C98 C113 C119 C122 L1 R1-R12 R14-R19 R21-R41 R43-R48 R52-R160 R162-R174 R177 = rcl
D1-D23 = diode
DRILEGEND = drilegend
IC1-IC7 IC9-IC11 = linear
IC8 = national-semiconductor; MF: NATIONAL SEMICONDUCTOR; MPN: LM2596S-ADJ/NOPB; OC_FARNELL: 9494367; OC_NEWARK: 41K3842
IC12 = ftdichip; MPN: FT232RL; OC_FARNELL: 1146032; OC_NEWARK: 91K9918
JP1-JP3 JP5 = jumper
OP.MODE S1 S2 SENSIBILIDADE = switch
Q1-Q4 Q6 Q7 = crystal; OC_FARNELL: unknown; OC_NEWARK: unknown
R13 R20 = pot
S3-S6 = switch-omron; MPN: B3F-1000; OC_FARNELL: 176432; OC_NEWARK: 36M3542
SV1-SV3 = con-lstb; OC_FARNELL: unknown; OC_NEWARK: unknown
U20 = NXP_By_element14_Batch_1; MPN: PCA82C251T/N3; OC_FARNELL: 1201274; OC_NEWARK: -; PACKAGE: SOIC-8; SUPPLIER: NXP
U$14 = frames
U$31 = Microchip_By_element14_Batch_1; MPN: MCP2515-I/SO; OC_FARNELL: 1292239; OC_NEWARK: 29H7136; PACKAGE: SOIC-18; SUPPLIER: Microchip
X2 = con-cypressindustries; OC_FARNELL: unknown; OC_NEWARK: unknown
X3-X6 = con-phoenix-508

## Nets
+5V: ADMISSÃO.11 ADMISSÃO.32 C37.1 C39.+ C42.1 C43.1 C44.2 C48.1 C55.1 C58.1 C60.1 C61.1 C63.+ C64.+ C66.+ C71.1 C72.1 C76.1 C93.1 C94.1 C96.1 C97.1 C98.+ C99.1 C101.1 C119.+ C122.+ C123.1 C125.1 C126.1 C130.2 C133.1 C134.1 COMUNICACAO.11 COMUNICACAO.32 D1.C D2.C D3.C D5.C D6.C D8.C D9.C D10.C D11.C D12.C D13.C D14.C D15.C D16.C D17.C D18.C D19.C D20.C D21.C D22.C GERENCIAMENTO.11 GERENCIAMENTO.32 IC8.4 IC12.4 IC12.20 L1.2 MC1.8 PIN.6 PIN.8 PIN.55 PIN.62 R13.E R19.2 R20.E R24.2 R35.1 R36.1 R38.1 R41.1 R43.1 R44.1 R48.1 R64.2 R69.1 R72.1 R73.1 R76.2 R79.1 R85.1 R86.1 R87.1 R90.1 R91.1 R108.1 R110.2 R112.2 R114.1 R115.2 R117.1 R127.2 R128.2 R129.1 R131.1 R133.1 R135.1 R137.1 R139.1 R141.1 R143.1 R169.2 R170.1 R172.1 R173.1 RX.A RXCAN.A SENSIBILIDADE.1 SINCRONISMO.11 SINCRONISMO.32 TX.A TXCAN.A U1.3 U2.3 U3.3 U20.3 U$2.8 U$19.P$2 U$22.1 U$31.18 U$32.3 U$33.2
+VBAT: PIN.15 U$11.2 X3.2
AQUECE_SONDA_PIN13: PIN.13 U$1.2 U$1.4
AQUECE_SONDA_PIN_1: PIN.1 U$16.2 U$16.4
BOBINA_1: C41.1 R42.2 U$4.SOURCE X5.1
BOBINA_2: C47.1 R49.2 U$6.SOURCE X5.2
BOBINA_3: C46.1 R50.2 U$7.SOURCE X5.3
BOBINA_4: C49.1 R51.2 U$8.SOURCE X5.4
BOMBA_PARTIDA_FRIO_PIN48: PIN.48 U$27.2 U$27.4
BORBOLETA_PIN_66: BORBOLETA_2.1 PIN.66 U$3.14 U$3.15
BORBOLETA_PIN_80: BORBOLETA_1.1 PIN.80 U$3.6 U$3.7
BOTAO_A/C_ACION_AR_COND_PIN44: C54.1 PIN.44 R68.1 SENSOR_IN.1
CANH_P: PIN.31 R166.2 U20.7
CANL_N: PIN.32 R166.1 U20.6
CARVAO_ATIVO_PIN14: PIN.14 U$13.2 U$13.4
DGND: ADMISSÃO.12 ADMISSÃO.31 BOB1.C BOB2.C C23.1 C33.2 C34.2 C35.1 C36.2 C37.2 C39.- C42.2 C43.2 C44.1 C45.1 C48.2 C50.2 C51.2 C53.1 C54.2 C55.2 C56.2 C57.2 C58.2 C59.2 C60.2 C61.2 C64.- C66.- C69.1 C70.1 C72.2 C73.1 C74.1 C75.2 C76.2 C86.1 C87.1 C89.1 C90.1 C93.2 C94.2 C96.2 C97.2 C98.- C99.2 C100.2 C101.2 C102.2 C104.1 C105.2 C106.2 C119.- C122.- C123.2 C124.2 C125.2 C126.2 C127.2 C128.2 C130.1 C131.2 C132.2 C133.2 C134.2 COMUNICACAO.12 COMUNICACAO.31 GERENCIAMENTO.12 GERENCIAMENTO.31 IC12.7 IC12.18 IC12.21 IC12.25 IC12.26 IGN1.C IGN2.C IGN3.C IGN4.C INJ1.C INJ2.C INJ3.C INJ4.C JP1.5 JP2.5 JP3.5 JP5.5 LED4.C OP.MODE.3 PIN.2 PIN.67 R31.2 R33.1 R34.1 R39.2 R45.2 R46.2 R67.2 R70.2 R74.2 R80.2 R88.2 R92.2 R94.1 R96.1 R98.1 R100.1 R102.1 R130.2 R132.2 R134.2 R136.2 R138.2 R140.2 R142.2 R144.2 R148.1 R149.1 R150.1 R151.1 R163.1 R165.1 S3.1 S3.2 S4.1 S4.2 S5.1 S5.2 S6.1 S6.2 SENSIBILIDADE.3 SINCRONISMO.12 SINCRONISMO.31 U1.12 U2.12 U3.12 U20.2 U$1.3 U$2.2 U$13.3 U$16.3 U$17.3 U$19.P$1 U$19.P$16 U$22.2 U$26.3 U$27.3 U$28.3 U$29.3 U$30.3 U$31.9 U$32.1 U$33.3 X2.4 X2.5
DGND_PIN_20: C21.2 PIN.20 R22.1 R23.1 U$9.4 U$9.5
DGND_PIN_21: C24.2 PIN.21 R62.1 R63.1 U$10.4 U$10.5
ED_PIN_57: PIN.57 R147.1 SINCRONISMO.15
ED_PIN_71: PIN.71 R146.1 SINCRONISMO.16
EMBREAGEN_PIN_38: C59.1 PIN.38 R81.1 SENSO_EMBR_IN.1
ENTRADA_DIGITAL_PIN_53: PIN.53 SV3.2 SV3.8
FREIO_PIN_51: C56.1 PIN.51 R75.1 SENSO_FREIO_IN.1
GND3: +5V.C +12V.C C1.2 C2.2 C4.1 C5.2 C6.2 C8.2 C9.2 C10.1 C12.1 C13.2 C14.2 C16.2 C17.2 C18.2 C19.2 C20.2 C25.1 C27.1 C28.2 C29.2 C30.1 C32.1 C63.- C65.2 C71.2 C78.2 C79.2 C80.1 C81.1 C82.1 C84.1 C85.2 C88.1 C91.1 C103.1 C107.1 C108.2 C109.2 C110.2 C112.2 C113.- C114.2 C117.2 C118.2 C120.1 C121.1 D7.A D23.A IC1.4 IC2.4 IC3.4 IC4.4 IC5.4 IC6.4 IC7.4 IC8.3 IC8.5 IC9.4 IC10.4 IC11.4 PIN.7 PIN.19 PIN.54 PIN.61 R156.1 R160.1 U$3.1 X3.1
IGND: C38.2 C40.2 C62.2 C95.- C115.2 MC1.33 PIN.28 R53.2 R54.1 R55.2 R56.2 R57.2 R58.2 U$3.10 U$3.11 U$3.12 U$3.21A
INJETOR_1_PIN_79: MC1.1 PIN.79
INJETOR_2_PIN_59: MC1.16 PIN.59
INJETOR_3_PIN_73: MC1.32 PIN.73
INJETOR_4_PIN_65: MC1.17 PIN.65
INJETOR_PART_FRIO_PIN_64: PIN.64 U$26.2 U$26.4
KNOCK_PIN_63: C68.2 PIN.63
KNOCK_PIN_77: C67.2 PIN.77
LAMBDA_1_PIN_46: PIN.46 R21.1 R23.2 R24.1
LAMBDA_2_PIN_47: PIN.47 R61.1 R63.2 R64.1
LINHA15: ADMISSÃO.33 COMUNICACAO.33 GERENCIAMENTO.34 LINHA15.1 R91.2 SINCRONISMO.34 U1.1
LINHA_15_PIN4: PIN.4 S1.1.1 S1.1.2
LINHA_15_PIN27: C40.1 C95.+ C115.1 COND_ANA_1_IN.1 PIN.27 R11.1 S1.3.1 S1.3.2 U$3.4 U$3.5 U$3.16
MAP_PIN10: PIN.10 S2.3.1 S2.3.2
MAP_PIN70: PIN.70 S2.1.1 S2.1.2
N$1: C1.1 D1.A IC1.3 R1.2
N$2: IC1.1 IC1.2 R2.1
N$3: C9.1 D3.A IC3.3 R4.2
N$4: C3.1 R2.2 R3.1
N$5: C4.2 IC1.5 R3.2
N$6: C109.1 D2.A IC2.3 R5.2
N$7: IC2.1 IC2.2 R6.1
N$8: C7.2 R6.2 R7.1
N$9: C6.1 IC2.5 R7.2
N$10: C16.1 D17.A IC4.3 R8.2
N$11: IC3.1 IC3.2 R9.1
N$12: C11.1 R9.2 R10.1
N$13: C12.2 IC3.5 R10.2
N$14: C78.1 D9.A IC10.3 R11.2 R156.2
N$15: IC10.1 IC10.2 R12.1
N$16: C19.1 D19.A IC5.3 R16.2
N$17: IC4.1 IC4.2 R14.1
N$18: C15.2 R14.2 R15.1
N$19: C114.1 IC4.5 R15.2
N$20: BOB1.A R146.2
N$21: IC5.1 IC5.2 R17.1
N$22: C111.1 R17.2 R18.1
N$23: C18.1 IC5.5 R18.2
N$24: C22.1 C23.2 R21.2 U$9.3
N$25: C21.1 C22.2 R22.2 U$9.2
N$26: C52.1 C53.2 R61.2 U$10.3
N$27: C24.1 C52.2 R62.2 U$10.2
N$28: R59.2 U$9.8
N$29: C107.2 D5.A IC6.3 R25.2
N$30: IC6.1 IC6.2 R26.1
N$31: C26.1 R26.2 R27.1
N$32: C27.2 IC6.5 R27.2
N$33: C29.1 D6.A IC7.3 R28.2
N$34: IC7.1 IC7.2 R29.1
N$35: C31.1 R29.2 R30.1
N$36: C32.2 IC7.5 R30.2
N$37: COMUNICACAO.2 LED2.C
N$38: LED2.A R19.1
N$39: C33.1 R33.2 U$2.7
N$40: R87.2 R88.1 U3.10
N$41: R37.1 U$2.3
N$42: R34.2 U$2.10
N$43: C35.2 OP.MODE.2 R35.2 U$2.14
N$44: R39.1 R40.2 U3.7
N$45: C36.1 R40.1 R170.2 ROT_DIG_IN.1 SV3.1
N$46: SENSIBILIDADE.2 U$2.5
N$47: C38.1 U$3.17
N$48: C41.2 MC1.2 R42.1 R55.1
N$49: R59.1 U$9.1
N$50: R82.1 U$22.17
N$51: BOB2.A R147.2
N$52: C89.2 Q3.1 R145.2 SINCRONISMO.13
N$53: R46.1 R47.2 R108.2 U2.5
N$55: C47.2 MC1.15 R49.1 R56.1
N$56: R60.2 U$9.6
N$57: C46.2 MC1.31 R50.1 R57.1
N$58: R65.2 U$10.8
N$59: C49.2 MC1.18 R51.1 R58.1
N$60: R65.1 U$10.1
N$61: C62.1 R52.2 R54.2 U$4.DRAIN U$6.DRAIN U$7.DRAIN U$8.DRAIN
N$62: MC1.3 U$4.GATE
N$63: MC1.14 U$6.GATE
N$64: R66.2 U$10.6
N$65: MC1.30 U$7.GATE
N$66: R67.1 R68.2 U2.11
N$67: MC1.19 U$8.GATE
N$68: MC1.26 R52.1
N$69: MC1.27 R53.1
N$70: +12V.A R154.1
N$71: R70.1 R71.2 U3.5
N$72: C57.1 PIN.23 R71.1 SENSOR_IN1.1
N$73: R74.1 R75.2 U2.9
N$74: R129.2 R130.1 U3.4
N$75: C65.1 C113.+ D4.C D23.C IC8.1 R154.2
N$76: D7.C IC8.2 L1.1
N$77: R80.1 R81.2 U2.7
N$78: R131.2 R132.1 U2.10
N$80: R77.1 U$22.18
N$81: R77.2 R78.1 U$22.19
N$82: +5V.A R76.1
N$83: C68.1 R78.2
N$84: R82.2 R83.1 U$22.16
N$85: C67.1 R83.2
N$86: C70.2 Q4.1 R84.1 U$22.10
N$87: C69.2 Q4.2 R84.2 U$22.9
N$92: C73.2 GERENCIAMENTO.13 Q1.1 R109.1
N$93: R92.1 R93.2 U1.7
N$94: GERENCIAMENTO.1 R89.2
N$95: C51.1 JP1.1 R89.1 R90.2 S3.3 S3.4
N$97: SINCRONISMO.2 X4.1
N$98: LED3.A R110.1
N$99: R95.1 R98.2 U$16.1
N$100: GERENCIAMENTO.15 LED1.C
N$101: R96.2 R97.1 U$1.1
N$102: LED1.A R112.1
N$103: MAP_IN.1 R5.1 S2.2.1 S2.2.2
N$104: R94.2 R99.1 U$13.1
N$105: LED4.A R111.1
N$106: ADMISSÃO.15 LED16.C
N$107: R100.2 R103.1 U$17.1
N$108: ANTER_IN.1 PIN.11 R157.1
N$109: C75.1 LINHA_15_IN.1 R93.1 R111.2 S1.2.1 S1.2.2
N$110: C77.1 R12.2 R104.1
N$111: C80.2 IC10.5 R104.2
N$112: C103.2 D10.A IC11.3 R105.2
N$113: IC11.1 IC11.2 R152.1
N$116: C83.1 R107.1 R152.2
N$117: C84.2 IC11.5 R107.2
N$118: C106.1 PIN.60 R44.2 R45.1 SENSOR_FASE_IN.1 U3.9
N$120: C74.2 GERENCIAMENTO.14 Q1.2 R109.2
N$121: LED16.A R115.1
N$122: R32.1 R148.2 U$26.1
N$123: C90.2 Q3.2 R145.1 SINCRONISMO.14
N$125: ADMISSÃO.13 C86.2 Q2.1 R174.2
N$126: ADMISSÃO.1 R113.2
N$127: C102.1 JP2.1 R113.1 R114.2 S5.3 S5.4
N$130: ADMISSÃO.14 C87.2 Q2.2 R174.1
N$131: LED3.C SINCRONISMO.4 X6.2
N$132: C117.1 D21.A IC9.3 R157.2 R160.2
N$133: IC9.1 IC9.2 R158.1
N$134: R116.2 SINCRONISMO.1
N$135: C100.1 JP3.1 R116.1 R117.2 S6.3 S6.4
N$136: JP3.2 SINCRONISMO.40
N$137: JP3.3 SINCRONISMO.39
N$138: R137.2 R138.1 U2.4
N$140: SINCRONISMO.3 X6.3
N$141: INJ1.A R119.2
N$142: INJ2.A R120.2
N$143: INJ3.A R121.2
N$144: INJ4.A R122.2
N$145: IGN1.A R123.2
N$146: IGN2.A R124.2
N$147: IGN3.A R125.2
N$148: IGN4.A R126.2
N$159: C116.1 R158.2 R159.1
N$163: R133.2 R134.1 U2.8
N$167: R139.2 R140.1 U2.6
N$168: R135.2 R136.1 U3.8
N$169: R141.2 R142.1 U1.6
N$170: R143.2 R144.1 U3.6
N$171: COMUNICACAO.38 U$19.P$14
N$172: COMUNICACAO.37 U$19.P$13
N$173: COMUNICACAO.36 U$19.P$12
N$174: C120.2 IC9.5 R159.2
N$176: R106.1 R149.2 U$27.1
N$177: COMUNICACAO.35 U$19.P$11
N$178: R101.1 R102.2 U$30.1
N$180: R150.2 R153.1 U$29.1
N$181: SINCRONISMO.5 X6.1
N$182: R151.2 R155.1 U$28.1
N$183: IC12.16 X2.2
N$184: IC12.15 X2.3
N$185: C124.1 IC12.17
N$186: R118.2 RX.C
N$187: IC12.23 R118.1
N$188: R162.2 TX.C
N$189: IC12.22 R162.1
N$190: IC12.19 R163.2 R164.2
N$191: R164.1 X2.1
N$192: R165.2 U20.8
N$193: R167.2 TXCAN.C
N$194: R168.2 RXCAN.C
N$195: R168.1 U20.1 U$31.1
N$196: R167.1 U20.4 U$31.2
N$197: C127.1 Q7.2 U$31.8
N$198: C128.1 Q7.1 U$31.7
N$199: R169.1 U$31.17
N$201: C104.2 JP5.1 R171.1 R172.2 S4.3 S4.4
N$202: COMUNICACAO.40 JP5.2
N$203: COMUNICACAO.1 R171.2
N$204: C131.1 COMUNICACAO.14 Q6.2 R177.1
N$205: R173.2 U$19.P$15
N$206: U$19.P$3 U$32.2
N$208: C132.1 COMUNICACAO.13 Q6.1 R177.2
N$209: COMUNICACAO.39 JP5.3
N$211: COMUNICACAO.8 U$19.P$4
N$212: COMUNICACAO.9 U$19.P$5
N$213: COMUNICACAO.10 U$19.P$6
PEDAL1_PIN_33: PEDAL1_IN.1 PIN.33 R1.1
PEDAL2_PIN_45: PEDAL2_IN.1 PIN.45 R4.1
RA0_ADMISS_TPS_1: ADMISSÃO.2 C26.2 C28.1 D14.A IC6.6 IC6.7 RA0_ADMISS_TPS_1.1
RA0_GERENC_PEDAL_1: C3.2 C88.2 D8.A GERENCIAMENTO.2 IC1.6 IC1.7 RA1_GERENC_PEDAL_1.1
RA1_ADMISS_TPS_2: ADMISSÃO.3 C31.2 C108.1 D15.A IC7.6 IC7.7 RA1_ADMISS_TPS_2.1
RA1_GERENC_PEDAL2: C11.2 C91.2 D11.A GERENCIAMENTO.3 IC3.6 IC3.7 RA2_GERENC_PEDAL2.1
RA2_ADMISS_ALTERNADOR: ADMISSÃO.4 C116.2 C121.2 D22.A IC9.6 IC9.7 RA2_ADMISS_ALTERNADOR.1
RA2_GERENC_LAMBDA_1: GERENCIAMENTO.4 R60.1
RA3_ADMISS_DI2__BORBO: ADMISSÃO.5 U$3.13
RA3_GERENC_LAMBDA_2: GERENCIAMENTO.5 R66.1
RA4_SINCRO_BOM_PART_FRIA: R106.2 SINCRONISMO.6
RA5_GERENC_TEMP_ÁGUA: C17.1 C111.2 D20.A GERENCIAMENTO.7 IC5.6 IC5.7 TEMP_H2O_OUT.1
RB0_GERENC_SELEC_ROTACAO_1: GERENCIAMENTO.33 SV1.1
RB0_GERENC_SELEC_ROTACAO_2: GERENCIAMENTO.36 SV1.3
RB0_SINCRO_SELEC_ROTACAO_1: SINCRONISMO.33 SV2.1
RB0_SINCRO_SELEC_ROTACAO_2: SINCRONISMO.38 SV2.3
RB1_ADMISS_DI1_BORBO: ADMISSÃO.34 U$3.18
RB1_COMUN_INT_CAN: COMUNICACAO.34 U$31.12
RB2_ADMISS_COD_BORBO: ADMISSÃO.35 U$3.8
RB2_GERENC_CS_COMUN: COMUNICACAO.7 GERENCIAMENTO.35
RB2_SINCRO_INJ_PART_FRIA: R32.2 SINCRONISMO.35
RB3_ADMISS_IN1_BORBO: ADMISSÃO.36 U$3.3
RB3_SINCRO_VENT_VEL_1: R153.2 SINCRONISMO.36
RB4_ADMISS_SF_BORBO: ADMISSÃO.37 R41.2 U$3.2
RB4_GERENC_TEMP_AR: C13.1 C15.1 D18.A GERENCIAMENTO.37 IC4.6 IC4.7 TEMP_AR_OUT.1
RB4_SINCRO_VENT_VEL_2: R101.2 SINCRONISMO.37
RB5_ADMISS_IN2_BORBO: ADMISSÃO.38 U$3.19
RB5_GERENC_PRESSãO_A/C: C83.2 C85.1 D13.A GERENCIAMENTO.38 IC11.6 IC11.7 RB5_GERENC_PRESSãO_A/C.1
RB6_ADMISS: ADMISSÃO.39 JP2.3
RB6_GERENC_BATERIA: C77.2 C81.2 D12.A GERENCIAMENTO.39 IC10.6 IC10.7 JP1.3 RA0_GERENC_BATERIA.1
RB7_ADMISS: ADMISSÃO.40 JP2.2
RB7_GERENC_INT/HOLD_KNOCK: GERENCIAMENTO.40 JP1.2 U$22.7
RC0_COMUN_RTS_FT232: COMUNICACAO.15 IC12.3
RC1_COM_CTS_FT232: COMUNICACAO.16 IC12.11
RC1_GERENC_CS_INJ/IGN: GERENCIAMENTO.16 MC1.4
RC2_COM_CS_CAN: COMUNICACAO.17 U$31.16
RC2_GERENCI_COMBUSTIVEL: GERENCIAMENTO.17 R48.2 RC2_GERENCI_COMBUSTIVEL.1 U2.2
RC2_SINCRO_RELE_AR_COND: R155.2 SINCRONISMO.17
RC6_GERENCI_RA5_CS_SINCRON: GERENCIAMENTO.25 SINCRONISMO.7
RC6_SINCRO_MAXI_IGN/INJ: MC1.29 SINCRONISMO.25
RC7_GERENCIA_EMBREAGEM: GERENCIAMENTO.26 R79.2 RC7_GERENCIA_EMBREAGEM.1 U2.1
RC7_SINCRO_NOMI_IGN/INJ: MC1.28 SINCRONISMO.26
RD0_SINCRO_DIN0_IGN/INJ: MC1.10 R119.1 SINCRONISMO.21
RD1_ADMISS_VELOCIDA: ADMISSÃO.20 MEDI_VELO_OUT.1 R86.2 U3.13
RD1_SINCRO_DIN1_IGN/INJ: MC1.11 R120.1 SINCRONISMO.22
RD2_GERENC_FREIO_1: GERENCIAMENTO.21 R72.2 RD2_GERENC_FREIO_1.1 U3.2
RD2_SINCRO_DIN2_IGN/INJ: MC1.12 R121.1 SINCRONISMO.19
RD3_GERENC_CS_KNOCK: GERENCIAMENTO.22 U$22.8
RD3_SINCRO_DIN3_IGN/INJ: MC1.13 R122.1 SINCRONISMO.20
RD4_SINCRO_GIN0_IGN/INJ: MC1.24 R123.1 SINCRONISMO.27
RD5_GERENC_FREIO_2: GERENCIAMENTO.28 R73.2 RD5_GERENC_FREIO_2.1 U2.14
RD5_SINCRO_GIN1_IGN/INJ: MC1.23 R124.1 SINCRONISMO.28
RD6_ADMISS_AQUEC_SONDA_1: ADMISSÃO.29 R95.2
RD6_GERENC_BOTÃO_A/C: GERENCIAMENTO.29 R69.2 RD6_GERENC_BOTÃO_A/C.1 U2.13
RD6_SINCRO_GIN2_IGN/INJ: MC1.22 R125.1 SINCRONISMO.29
RD7_ADMISS_AQUEC_SONDA_2: ADMISSÃO.30 R97.2
RD7_GERENC_BOMB_INJ: GERENCIAMENTO.30 R103.2
RD7_SINCRO_GIN3_IGN/INJ: MC1.21 R126.1 SINCRONISMO.30
RE0_GERENC_MAP: C5.1 C7.1 D16.A GERENCIAMENTO.8 IC2.6 IC2.7 MAP_OUT.1
RE0_SINCRO_OUT_EN_IGN/INJ: MC1.9 R127.1 SINCRONISMO.8
RE1_GERENC_RA5_CHIP_SELEC_ADMISS: ADMISSÃO.7 GERENCIAMENTO.9
RE1_SINCRO_SPK_IGN/INJ: MC1.20 R128.1 SINCRONISMO.9
RE2_ADMISS_CARVãO: ADMISSÃO.10 R99.2
RE2_GERENC_OUT_KNOCK: GERENCIAMENTO.10 U$22.4
RE2_SINCRO_FASE: R43.2 RE2_SINCRO_FASE.1 SINCRONISMO.10 U3.14
RELE_AR_CONDICIONADO_PIN42: PIN.42 U$28.2 U$28.4
RELUTÂNCIA: C34.1 R37.2 RELUTÂNCIA.1 SV3.7
RELÉ5_BOMBA_INJET_PIN26: PIN.26 U$17.2 U$17.4
ROT_ANA: R36.2 ROT_ANAL.1 SV3.6 U$2.12
ROT_DIG: R38.2 ROT_DIG_OUT.1 SV3.4 U3.1
ROTAÇÃO: SV1.2 SV2.2 SV3.3 SV3.5
RX1_COM: COMUNICACAO.26 IC12.1
RX2_COMUN_TXD_BLUETO: COMUNICACAO.30 U$33.4
SCK1_GERENC: ADMISSÃO.18 GERENCIAMENTO.18 MC1.5 SINCRONISMO.18 U$22.13
SCK2_COM: COMUNICACAO.19 U$31.13
SCK2_GERENC: COMUNICACAO.18 GERENCIAMENTO.19
SDI1_GERENC: ADMISSÃO.24 GERENCIAMENTO.23 MC1.7 SINCRONISMO.24 U$22.11
SDI2_COM: COMUNICACAO.20 U$31.15
SDI2_GERENC: COMUNICACAO.24 GERENCIAMENTO.20
SDO1_GERENC: ADMISSÃO.23 GERENCIAMENTO.24 MC1.6 SINCRONISMO.23 U$22.12
SDO2_COM: COMUNICACAO.27 U$31.14
SDO2_GERENC: COMUNICACAO.23 GERENCIAMENTO.27
SENSOR_COMBUSTIVEL: C45.2 R47.1 SENSOR_COMB_IN.1 X4.2
SENSOR_PRESSAO_A/C_PIN17: COND_ANA2_IN.1 PIN.17 R105.1
SENSOR_VELOCIDADE: C105.1 MEDI_VELO_IN.1 PIN.5 R31.1 R85.2 U3.11 X4.3
TEMP_AR_IN_PIN_56: C110.1 PIN.56 R8.1 R13.S TEMP_AR_IN.1
TEMP_ÁGUA_PIN_74: C20.1 PIN.74 R16.1 R20.S TEMP_H2O_IN.1
TPS1_PIN_75: PIN.75 R25.1 TPS_1_IN.1
TPS2_PIN_68: PIN.68 R28.1 TPS_2_IN.1
TX1_COM: COMUNICACAO.25 IC12.5
TX2_COMUN_RXD_BLUETO: COMUNICACAO.29 U$33.5
V+: C2.1 C8.1 C10.2 C14.1 C25.2 C30.2 C50.1 C79.1 C82.2 C112.1 C118.1 D4.A IC1.8 IC2.8 IC3.8 IC4.8 IC5.8 IC6.8 IC7.8 IC9.8 IC10.8 IC11.8 MC1.25 U$9.7 U$10.7 U$11.1
VENTILADOR_VEL_1_PIN22: PIN.22 U$29.2 U$29.4
VENTILADOR_VEL_2_PIN40: PIN.40 U$30.2 U$30.4

## Tracks (layer width: path | path; a pad name or v marks a point on that pad's centre or on a via)
+5V  (via drill 0.3, 0.3 pad 0.81, 0.6, 0.9)
  Top 0.254: U$19.P$2 197.16,134.61 C130.2
  Top 0.406: R128.2 130.85,30.87 R127.2 131.4,30.83 133.98,28.24 MC1.8 138.72,28.24 | R172.1 186.21,116.4 186.21,126.69 187.31,127.79 187.31,129.79 187.48,129.96 R19.2 | v172.07,145.06 172.05,140.74 173.53,139.26 TX.A 174.1,139.22 RX.A 177.85,138.58 v177.85,137.27 | v111.54,82.31 TXCAN.A | 127.36,90.76 127.34,90.78 | 132.08,102.29 SENSIBILIDADE.1 | R36.1 131.98,90.69 130.93,89.64 | PIN.6 17.7,101.83 16.94,101.08 16.94,99.38 17.71,98.59 19.42,98.59 20.52,97.51 v21.53,97.51 | R41.1 61.34,60.3 61.34,47.86 61.04,47.57 D5.C
  Top 0.61: D15.C D6.C 79.1,46.29 v79.1,47.79 | 65.54,45.53 D14.C | D12.C 49.75,137.98 D9.C 49.47,138.17 50.95,139.65 v51.57,139.65 | D13.C 66.55,138.22 D10.C 66.85,138.29 v68.97,138.29 | D16.C 75.62,98.33 D2.C 75.35,98.17 v73.72,98.17 | D20.C 55.91,88.37 D19.C 55.85,91.04 v57.38,92.5 | D11.C D3.C 52.97,123.67 v51.72,122.42 | 128.27,135.84 U2.3 v131.31,135.87 | 128.27,135.84 127.7,136.41 127.7,142.87 C101.1 | R137.1 137.3,135.86 | 137.3,135.86 C44.2 | 137.3,135.86 137.3,137.17 v137.29,137.18 136.58,137.88 R108.1 | v138.07,143.09 136.76,143.15 C60.1 R139.1 | R133.1 119.32,141.21 C58.1 118.01,141.95 v118.01,140.71 | C55.1 R131.1 118.01,136.17 v118.01,134.78 | 128.27,135.84 128.22,135.84 v127.24,134.85 | v130.93,132.4 130.93,130.78 R48.1 131.52,130.76 R79.1 | v122.19,132.64 121.08,131.21 R69.1 120.96,131.18 R73.1 | D21.C 79.73,83.88 D22.C 79.85,84.17 79.85,85.42 v80.35,85.92 | R135.1 186.16,88.98 | 186.16,88.98 C43.1 | R143.1 168.75,88.16 C37.1 167.03,87.36 v167.6,86.79 | 186.16,88.98 187.16,88.98 R44.1 187.97,88.54 v189.22,88.54 | R85.1 189.8,94.14 C42.1 187.59,94.07 R87.1 187.32,94.07 187.68,94.43 v187.68,95.43 | R141.1 167.03,31.96 C76.1 166.62,32.35 v166.62,31.15 | 127.36,90.76 129.81,90.76 130.93,89.64 U$2.8 130.97,87.92 130.97,87.04 v131.6,86.42 | C99.1 103.82,108.36 GERENCIAMENTO.11 103.22,108.67 97.17,114.72 85.22,114.72 | COMUNICACAO.11 161.74,125.37 C134.1 | SINCRONISMO.32 165.31,51.31 C93.1 165.31,44.79 C39.+ | 26.65,7.66 v27.22,7.09 26.65,6.51 26.64,6.52 15.13,6.52 11.89,9.76 11.89,39.87 12.96,40.93 PIN.55 | 26.65,7.66 | 26.65,7.66 16.37,7.66 13.58,10.46 13.58,37.54 14.82,38.78 PIN.62